# Altium PCB Airplane_Navigation_&_Telemetery_Board.PcbDoc
Units mil, origin at the board's own origin, x right, y up, seen from the top; angles counter-clockwise.
Board outline 6000 x 4000 mil, 2 copper layers (Top Layer, Bottom Layer); 34 components, 22 nets, 201 pads, 9 vias.
Unrouted connection lines stored in the file: 37.
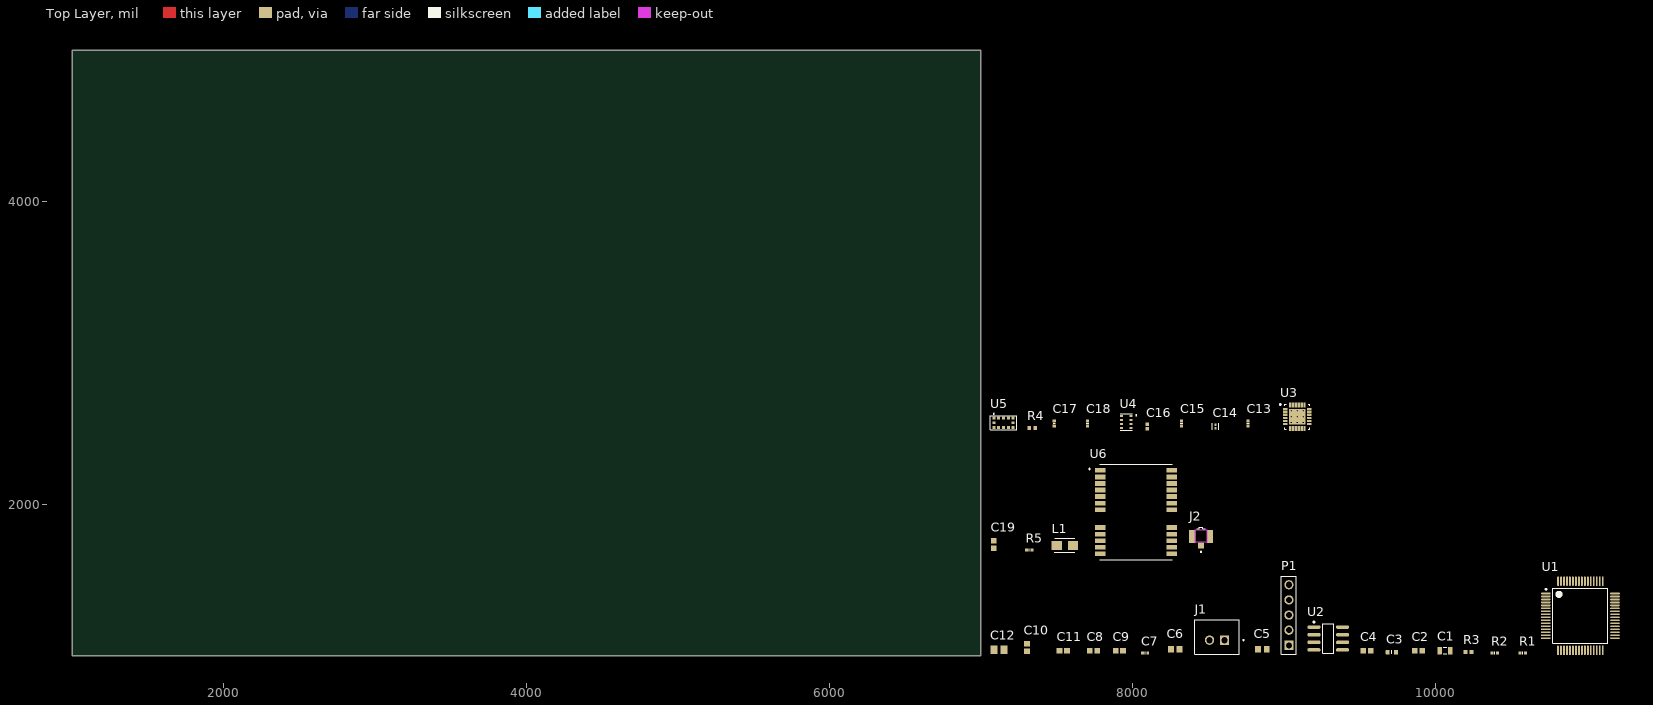
[diagram p0: Top Layer view]
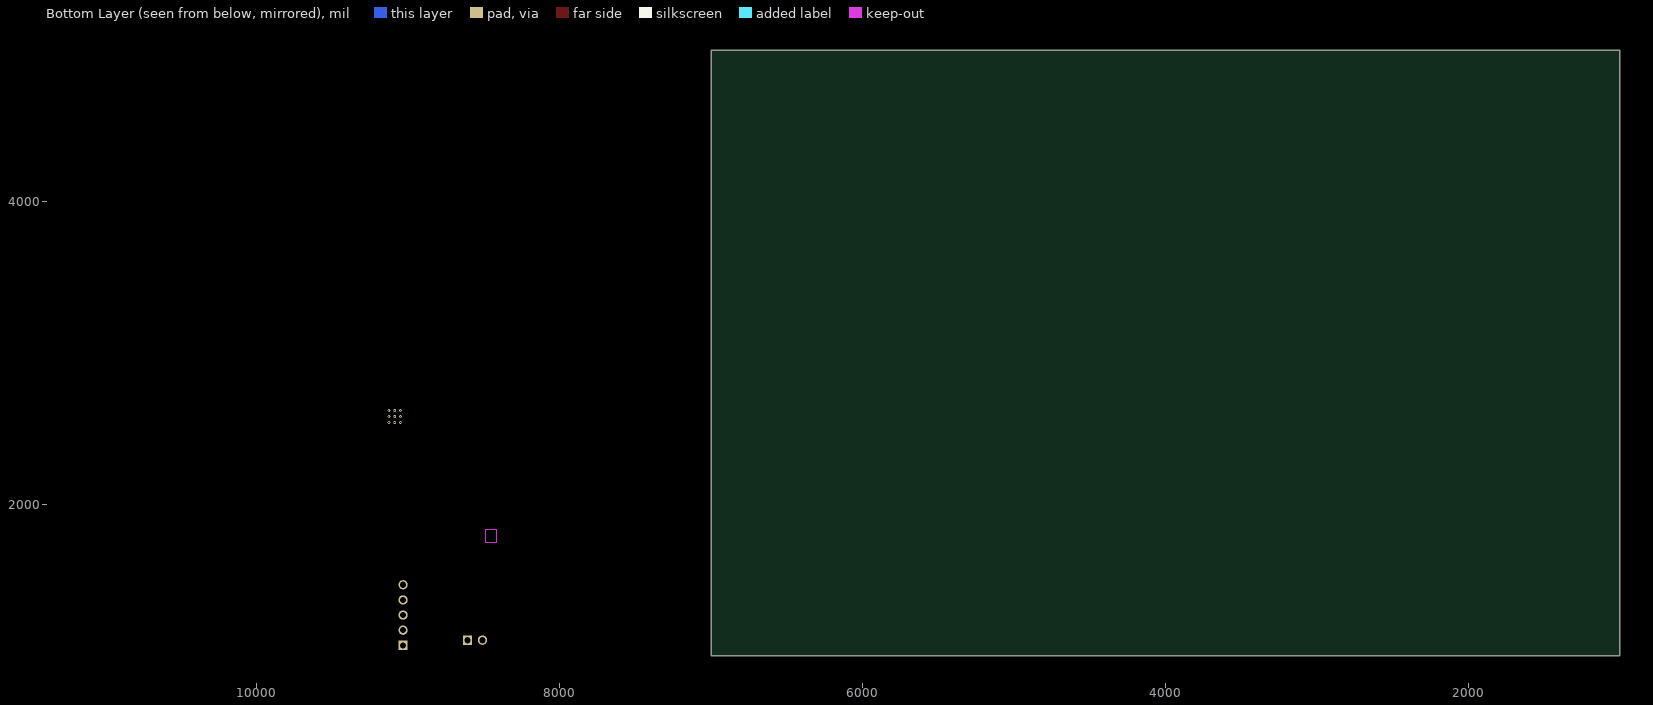
[diagram p1: Bottom Layer view, seen from below]

## Layer stack, top to bottom
Top Solder: solder mask 0.4, Solder Resist, Dk 3.5
Top Layer: signal copper 1.4
Dielectric 1: dielectric 12.6, FR-4, Dk 4.8
Bottom Layer: signal copper 1.4
Bottom Solder: solder mask 0.4, Solder Resist, Dk 3.5

## Board outline
1000,1000 7000,1000 7000,5000 1000,5000

## Design rules (kind name [scope] priority, off if disabled: settings)
Clearance [All] p1: gap=10 ignorepadtopadclearanceinfootprint=FALSE
PolygonConnect [All] p1: connectstyle=Relief reliefconductorwidth=10 reliefentries=4 polygonreliefangle="90 Angle" airgapwidth=10
RoutingVias [All] p1: holewidth=28 width=50 viastyle="Through Hole" minholewidth=28 minwidth=50 maxholewidth=28 maxwidth=50
SolderMaskExpansion [All] p1: expansion=0 istentingtop=FALSE
Width [All] p1: maxlimit=10 minlimit=10 preferedwidth=10
30 further rules are at their usual default settings.

## Classes and differential pairs
component class U_I2C_BUS: C13 C14 C15 C16 C17 C18 R4 U3 U4 U5
component class U_GPS: C19 J2 L1 R5 U6
component class Airplane_Navigation_&_Telemetry_Schematic: C1 C2 C3 C4 C5 C6 C7 C8 C9 C10 C11 C12 J1 P1 R1 R2 R3 U1 U2

## Components (designator, comment, footprint, x,y, rotation, side; value= is the part's Value field where it differs from the comment)
C1 "Capacitor 10µF +/-20% 25V 0805" CAPC0805(2012)145_L 10065,1035 r0 top value=10µF
C2 "Capacitor 100 nF +/-10% 50 V 0603" CAPC1608X90X40NL10T20 9890,1035 r0 top value=100nF
C3 "Capacitor 4.7µF +/-20% 10V 0603" CAPC0603(1608)100_L 9715,1025 r0 top value=4.7µF
C4 "Capacitor 100 nF +/-10% 50 V 0603" CAPC1608X90X40NL10T20 9550,1035 r0 top value=100nF
C5 "Capacitor 1uF +/- 10% 16V 0603" CAPC1608X90X35ML15T15 8860,1045 r0 top value=1µF
C6 "Capacitor 1uF +/- 10% 16V 0603" CAPC1608X90X35ML15T15 8285,1045 r0 top value=1µF
C7 "Capacitor 10nF +/-20% 50V 0402" CAPC0402(1005)60_L 8085,1020 r0 top value=10nF
C8 "Capacitor 100 nF +/-10% 50 V 0603" CAPC1608X90X40NL10T20 7745,1035 r0 top value=100nF
C9 "Capacitor 100 nF +/-10% 50 V 0603" CAPC1608X90X40NL10T20 7915,1035 r0 top value=100nF
C10 "Capacitor 100 nF +/-10% 50 V 0603" CAPC1608X90X40NL10T20 7305,1055 r90 top value=100nF
C11 "Capacitor 100 nF +/-10% 50 V 0603" CAPC1608X90X40NL10T20 7545,1035 r0 top value=100nF
C12 "Capacitor 10 uF +/- 10% 16 V 0805" CAPC2013X135X45NL10T25 7120,1040 r0 top value=10µF
C13 "Capacitor 100nF +/-20% 10V 0402" CAPC0402(1005)60_L 8765,2535 r90 top value=100nF
C14 "GRM033R70J222JA01J" FP-GRM033-0_03-IPC_B 8550,2515 r90 top
C15 "Capacitor 100nF +/-20% 10V 0402" CAPC0402(1005)60_L 8325,2535 r90 top value=100nF
C16 "Capacitor 0.1 uF +/- 5% 16 V 0402" CAPC1005X56X25LL10T15 8100,2515 r90 top value=100nF
C17 "Capacitor 100nF +/-20% 10V 0402" CAPC0402(1005)60_L 7485,2535 r90 top value=100nF
C18 "Capacitor 100nF +/-20% 10V 0402" CAPC0402(1005)60_L 7705,2535 r90 top value=100nF
C19 "Capacitor 100 nF +/-10% 50 V 0603" CAPC1608X90X40NL10T20 7085,1735 r90 top value=100nF
J1 "B2B-XH-A_(LF)(SN)" JST_B2B-XH-A_(LF)(SN) 8560,1125 r0 top
J2 "20279-001E-03" IPEX_20279-001E-03 8455,1790 r0 top
L1 "LQW31HN27NJ03L" FP-LQW31HN_03-MFG 7555,1730 r0 top
P1 "TSW-105-05-L-S" SMTC-TSW-105-05-X-S 9035,1070 r90 top
R1 "Resistor 4K7  +/-1 % 0402 63 mW" RESC0402(1005)_L 10580,1020 r0 top value=4.7k
R2 "Resistor 4K7  +/-1 % 0402 63 mW" RESC0402(1005)_L 10395,1020 r0 top value=4.7k
R3 "Resistor 10k +/-1% 0402 100 mW" RESC1005X40X25ML05T05 10220,1025 r0 top value=10k
R4 "Resistor 10k +/-1% 0402 100 mW" RESC1005X40X25ML05T05 7340,2505 r0 top value=10k
R5 "Resistor 10R  +/-1 % 0402 63 mW" RESC0402(1005)_L 7320,1700 r0 top value=10
U1 "STM32F411RET6" STM-LQFP64_L 10960,1265 r0 top
U2 "LT1763IS8-3.3#PBF" LT-S8-8_N 9295,1115 r0 top
U3 "MPU6050" INSE-QFN-24_V 9090,2580 r0 top
U4 "BMP280" XDCR_BMP280 7960,2545 r0 top
U5 "VL53L0X" SENSOR_VL53L0X 7150,2540 r0 top
U6 "NEO-M9N-00B" XCVR_NEO-M9N-00B 8025,1950 r0 top

## Footprints (in the part's own frame and the unit in brackets; to place one, negate y for a bottom-side part, rotate by r counter-clockwise, add the part's x,y. Pads: shape width x height; smd on the part's side, far side on the other; paste and mask are expansions set on the pad)
CAPC0402(1005)60_L [mm] "Chip Capacitor, Body 1.0x0.5mm, Height 0.6mm, IPC High Density"
  rrect25% 0.5x0.55 smd: 1(-0.45,0) 2(0.45,0)
  silkscreen extent 0,-0.2 0,0.2, body extent -0.5,-0.25 0.5,0.25, height 0.6
CAPC0603(1608)100_L [mm] "Chip Capacitor, Body 1.6x0.8mm, Height 1.0mm, IPC High Density"
  rrect25% 0.66x0.76 smd: 1(-0.7,0) 2(0.7,0)
  silkscreen extent 0,-0.3 0,0.3, body extent -0.8,-0.4 0.8,0.4, height 0.95
CAPC0805(2012)145_L [mm] "Chip Capacitor, Body 2.0x1.2mm, Height 1.45mm, IPC High Density"
  rrect25% 0.76x1.3 smd: 1(-0.9,0) 2(0.89,0)
  silkscreen extent -0.3,-0.55 0.3,0.55, body extent -1,-0.6 1,0.6, height 1.45
CAPC1005X56X25LL10T15 [mm] "Chip Capacitor, 2-Leads, Body 1.10x0.60mm, IPC High Density"
  rect 0.58x0.54 smd: 1(-0.39,0) 2(0.39,0)
  body extent -0.55,-0.3 0.55,0.3, height 0.56
CAPC1608X90X35ML15T15 [mm] "Chip Capacitor, 2-Leads, Body 1.75x0.95mm, IPC Low Density"
  rect 1x1.1 smd: 1(-0.725,0) 2(0.725,0)
  body extent -0.87,-0.48 0.87,0.48, height 0.9
CAPC1608X90X40NL10T20 [mm] "Chip Capacitor, 2-Leads, Body 1.70x0.90mm, IPC Medium Density"
  rect 0.95x0.95 smd: 1(-0.625,0) 2(0.625,0)
  body extent -0.85,-0.45 0.85,0.45, height 0.9
CAPC2013X135X45NL10T25 [mm] "Chip Capacitor, 2-Leads, Body 2.10x1.35mm, IPC Medium Density"
  rect 1.2x1.4 smd: 1(-0.85,0) 2(0.85,0)
  body extent -1.05,-0.67 1.05,0.67, height 1.35
FP-GRM033-0_03-IPC_B [mil]
  rect 17.88x14.28 smd paste+0 mask+0: 1(-11.98,0) 2(11.98,0)
  silkscreen extent -21,-23 21,23, body extent -27,-13 27,13, height 10
FP-LQW31HN_03-MFG [mm]
  rect 1.75x1.5 smd paste+0 mask+0: 1(-1.375,0) 2(1.375,0)
  silkscreen extent -1.75,-1.17 1.7,1.17, body extent -2.35,-1 2.35,1, height 0.25
INSE-QFN-24_V [mm] "QFN, 24-Leads, Body 4.00x4.00mm, Pitch 0.50mm, Thermal Pad 2.7x2.6mm"
  rect 0.8x0.35 smd: 1(-2,1.25) 2(-2,0.75) 3(-2,0.25) 4(-2,-0.25) 5(-2,-0.75) 6(-2,-1.25) 13(2,-1.25) 14(2,-0.75) 15(2,-0.25) 16(2,0.25) 17(2,0.75) 18(2,1.25)
  rect 0.35x0.85 smd: 7(-1.25,-1.975) 8(-0.75,-1.975) 9(-0.25,-1.975) 10(0.25,-1.975) 11(0.75,-1.975) 12(1.25,-1.975) 19(1.25,1.975) 20(0.75,1.975) 21(0.25,1.975) 22(-0.25,1.975) 23(-0.75,1.975) 24(-1.25,1.975)
  rect 2.7x2.6 smd: 25(0,0)
  silkscreen extent -2.97,-2.1 2.1,2.17, body extent -2,-2 2,2, height 0.95
IPEX_20279-001E-03 [mm]
  rect 1x1.05 smd: 1(0,-1.525)
  rect 1.05x2.2 smd: 2(1.475,0) 3(-1.475,0)
  Keep-Out Layer region: 0.95,-1 -0.95,-1 -0.95,1.1 0.95,1.1
  silkscreen extent -0.7,-2.71 0.7,1.55, body extent -1.5,-1.55 1.5,1.55, height 1.25
JST_B2B-XH-A_(LF)(SN) [mm]
  rect 1.575x1.575 / inner round 1.575 / far side rect 1.575x1.575 hole 1.05: 1(1.25,-0.525)
  round 1.575 hole 1.05: 2(-1.25,-0.525)
  silkscreen extent -3.7,-2.88 4.54,2.88, body extent -3.7,-2.88 3.7,2.88, height 7
LT-S8-8_N [mm] "SOIC, 8-Leads, Body 4.9x3.9mm, Pitch 1.27mm, IPC Medium Density"
  oval 2.2x0.6 smd: 1(-2.4,1.905) 2(-2.4,0.635) 3(-2.4,-0.635) 4(-2.4,-1.905) 5(2.4,-1.905) 6(2.4,-0.635) 7(2.4,0.635) 8(2.4,1.905)
  silkscreen extent -2.52,-2.5 0.9,2.88, body extent -2,-2.5 2,2.5, height 1.76
RESC0402(1005)_L [mm] "Chip Resistor, Body 1.0x0.5mm, IPC High Density"
  rrect25% 0.5x0.55 smd: 1(-0.45,0) 2(0.45,0)
  silkscreen extent 0,-0.2 0,0.2, body extent -0.5,-0.25 0.5,0.25, height 0.3
RESC1005X40X25ML05T05 [mm] "Chip Resistor, 2-Leads, Body 1.05x0.55mm, IPC Low Density"
  rect 0.65x0.65 smd: 1(-0.5,0) 2(0.5,0)
  body extent -0.53,-0.28 0.53,0.28, height 0.4
SENSOR_VL53L0X [mm]
  rect 0.5x0.5 smd: 1(-1.6,0.8) 2(-0.8,0.8) 3(0,0.8) 4(0.8,0.8) 5(1.6,0.8) 6(1.6,0) 7(1.6,-0.8) 8(0.8,-0.8) 9(0,-0.8) 10(-0.8,-0.8) 11(-1.6,-0.8) 12(-1.6,0)
  silkscreen extent -2.2,-1.2 2.2,1.57
SMTC-TSW-105-05-X-S [mm] ".025 SQ Post Terminal Strip Assembly, 1x5 Pins, Vertical, 2.54mm Pitch, Male"
  rect 1.55x1.55 hole 1.02: 1(0,0)
  round 1.55 hole 1.02: 2(2.54,0) 3(5.08,0) 4(7.62,0) 5(10.16,0)
  silkscreen extent -1.46,-1.27 11.62,1.27, body extent -1.27,-1.27 11.43,1.27, height 5.21
STM-LQFP64_L [mm] "QFP, 64-Leads, Body 10x10mm, Pitch 0.5mm, IPC High Density"
  oval 1.6x0.3 smd: 1(-5.8,3.75) 2(-5.8,3.25) 3(-5.8,2.75) 4(-5.8,2.25) 5(-5.8,1.75) 6(-5.8,1.25) 7(-5.8,0.75) 8(-5.8,0.25) 9(-5.8,-0.25) 10(-5.8,-0.75) 11(-5.8,-1.25) 12(-5.8,-1.75) 13(-5.8,-2.25) 14(-5.8,-2.75) 15(-5.8,-3.25) 16(-5.8,-3.75) 33(5.8,-3.75) 34(5.8,-3.25) 35(5.8,-2.75) 36(5.8,-2.25) 37(5.8,-1.75) 38(5.8,-1.25) 39(5.8,-0.75) 40(5.8,-0.25) 41(5.8,0.25) 42(5.8,0.75) 43(5.8,1.25) 44(5.8,1.75) 45(5.8,2.25) 46(5.8,2.75) 47(5.8,3.25) 48(5.8,3.75)
  oval 0.3x1.6 smd: 17(-3.75,-5.8) 18(-3.25,-5.8) 19(-2.75,-5.8) 20(-2.25,-5.8) 21(-1.75,-5.8) 22(-1.25,-5.8) 23(-0.75,-5.8) 24(-0.25,-5.8) 25(0.25,-5.8) 26(0.75,-5.8) 27(1.25,-5.8) 28(1.75,-5.8) 29(2.25,-5.8) 30(2.75,-5.8) 31(3.25,-5.8) 32(3.75,-5.8) 49(3.75,5.8) 50(3.25,5.8) 51(2.75,5.8) 52(2.25,5.8) 53(1.75,5.8) 54(1.25,5.8) 55(0.75,5.8) 56(0.25,5.8) 57(-0.25,5.8) 58(-0.75,5.8) 59(-1.25,5.8) 60(-1.75,5.8) 61(-2.25,5.8) 62(-2.75,5.8) 63(-3.25,5.8) 64(-3.75,5.8)
  silkscreen extent -5.92,-4.6 4.6,4.6, body extent -5,-5 5,5, height 1.6
XCVR_NEO-M9N-00B [mm]
  rect 1.8x0.8 smd paste-2: 1(-6,7) 2(-6,5.9) 3(-6,4.8) 4(-6,3.7) 5(-6,2.6) 6(-6,1.5) 7(-6,0.4) 8(-6,-2.6) 9(-6,-3.7) 10(-6,-4.8) 11(-6,-5.9) 12(-6,-7) 13(6,-7) 14(6,-5.9) 15(6,-4.8) 16(6,-3.7) 17(6,-2.6) 18(6,0.4) 19(6,1.5) 20(6,2.6) 21(6,3.7) 22(6,4.8) 23(6,5.9) 24(6,7)
  silkscreen extent -7.9,-8 6.1,8, body extent -6.1,-8 6.1,8, height 2.6
XDCR_BMP280 [mm]
  rect 0.5x0.35 smd: 1(0.8,0.975) 2(0.8,0.325) 3(0.8,-0.325) 4(0.8,-0.975) 5(-0.8,-0.975) 6(-0.8,-0.325) 7(-0.8,0.325) 8(-0.8,0.975)
  silkscreen extent -1,-1.35 1.8,1.35

## Part data
C1: library part CMP-001-00079-4, "Chip Capacitor, 10µF +/-20%, 25V, 0805, Thickness 1.45 mm", Case/Package=0805, Max Operating Temperature=85°C, Min Operating Temperature=-55°C, Tolerance=10%, Voltage Rating=25V, Mounting Technology=SMT, Pins=2
C2 C4 C8 C9 C10 C11 C19: library part CMP-001-00017-6, "Chip Capacitor, 100 nF, +/- 10%, 50 V, 0603 (1608 Metric)", Capacitor Type=Ceramic, Case/Package=0603, Max Operating Temperature=125°C, Min Operating Temperature=-55°C, Tolerance=10%, Voltage Rating=50V, Mounting Technology=SM, Pins=2, RoHS Compliant=True
C3: library part CMP-001-00076-4, "Chip Capacitor, 4.7µF +/-20%, 10V, 0603, Thickness 1 mm", Case/Package=0603, Max Operating Temperature=85°C, Min Operating Temperature=-55°C, Tolerance=10%, Voltage Rating=10V, Mounting Technology=SMT, Pins=2
C5 C6: library part CMP-001-00004-6, "Chip Capacitor, 1 uF, +/- 10%, 16 V, 0603 (1608 Metric)", Capacitor Type=Ceramic, Case/Package=0603, Max Operating Temperature=125°C, Min Operating Temperature=-55°C, Tolerance=10%, Voltage Rating=16V, Mounting Technology=SM, Pins=2, RoHS Compliant=True
C7: library part CMP-001-00069-3, "Chip Capacitor, 10nF +/-20%, 50V, 0402, Thickness 0.6 mm", Case/Package=0402, Max Operating Temperature=85°C, Min Operating Temperature=-55°C, Tolerance=5%, Voltage Rating=50V, Mounting Technology=SMT, Pins=2
C12: library part CMP-001-00015-6, "Chip Capacitor, 10 uF, +/- 10%, 16 V, 0805 (2012 Metric)", Capacitor Type=Ceramic, Case/Package=0805, Max Operating Temperature=85°C, Min Operating Temperature=-55°C, Tolerance=10%, Voltage Rating=16V, Mounting Technology=SM, Pins=2, RoHS Compliant=True
C13 C15 C17 C18: library part CMP-001-00061-3, "Chip Capacitor, 100nF +/-20%, 10V, 0402, Thickness 0.6 mm", Case/Package=0402, Max Operating Temperature=85°C, Min Operating Temperature=-55°C, Tolerance=20%, Voltage Rating=10V, Mounting Technology=SMT, Pins=2
C14: library part CMP-06035-025705-1, "Chip Multilayer Ceramic Capacitors for General Purpose, 0201, 2200pF, X7R, 15%, 5%, 6.3V", Capacitance=2.2nF, Dielectric=X7R, Tolerance=5%, Voltage Rating (DC)=6.3V, Length=600um, Thickness=300um, Width=300um
C16: library part CMP-001-00001-6, "Chip Capacitor, 0.1 uF, +/- 5%, 16 V, 0402 (1005 Metric)", Capacitor Type=Ceramic, Case/Package=0402, Max Operating Temperature=125°C, Min Operating Temperature=-55°C, Tolerance=5%, Voltage Rating=16V, Mounting Technology=SM, Pins=2, RoHS Compliant=True
J1: library part CMP-002-00072-1, "Connector Header Through Hole 2 position 0.098 (2.50mm)", Case/Package=None, Check_prices=https://www.snapeda.com/parts/B2B-XH-A%20(LF)(SN)/JST+Sales+America+Inc./view-part/?ref=eda, Component Type=Standard, Design Item ID=B2B-XH-A_(LF)(SN), MF="JST Sales", MP="B2B-XH-A (LF)(SN)", Pins=2, SnapEDA_Link=https://www.snapeda.com/parts/B2B-XH-A%20(LF)(SN)/JST+Sales+America+Inc./view-part/?ref=snap, Source=B2B-XH-A_(LF)(SN).SchLib
J2: library part CMP-002-00071-1, "1 POS Vertical SMD Small form factor with big performance through 6 GHz connector,MHF, RF, micro-coaxial MHF I Receptacle", Case/Package=None, Check_prices=https://www.snapeda.com/parts/20279-001E-03/I-PEX/view-part/?ref=eda, Component Type=Standard, Design Item ID=20279-001E-03, MF=I-PEX, MP=20279-001E-03, Pins=3, SnapEDA_Link=https://www.snapeda.com/parts/20279-001E-03/I-PEX/view-part/?ref=snap, Source=20279-001E-03.SchLib
L1: library part CMP-06042-006372-1, "Wire Wound RF Inductor 27nH ±5% 0.0714Ω 560mA 1206", Case Code (Imperial)=1206, Case Code (Metric)=3216, Current Rating=560mA, DC Resistance (DCR)=51mR, Inductance=27nH, Max Operating Temperature=85°C, Min Operating Temperature=-40°C, Package Quantity=2000, Resistor Type=Wirewound, Self Resonant Frequency=1GHz, Test Frequency=100MHz, Tolerance=5%, Case/Package=1206, Core Material=Ferrite, DC Current=560mA, Depth=1.8mm, Height=1.8mm, Height - Seated (Max)=0.079inch, Length=3.2mm, Max DC Current=560mA, Military Standard=Not, Mount="Surface Mount", Packaging="Tape and Reel", Q Factor=60, Radiation Hardening=No, Shielding=Unshielded, Termination=SMD/SMT, Weight=0.000705oz, Width=0.063inch
P1: library part CMP-1024-00366-1, "0.025\" SQ Post Header, Through-hole, Vertical, -55 to 125 degC, 2.54 mm Pitch, 5-Pin, Male, RoHS", Manufacturer=Samtec, Temperature Range="-55 to 125 degC", ComponentLink1Description="Manufacturer URL", ComponentLink1URL=http://www.samtec.com, ComponentLink2Description=Datasheet, ComponentLink2URL=http://www.samtec.com/documents/webfiles/pdf/TSW_TH.PDF, ComponentLink3Description="Package Specification", ComponentLink3URL=http://www.samtec.com/documents/webfiles/cpdf/TSW-XXX-XX-XXX-X-XX-XXX-MKT.pdf, DatasheetVersion=F-214, Mounting Technology=Through-hole, Orientation=Vertical, PackageDescription=".025[0.64] SQ. Post Terminal Strip Assembly", PackageReference=TSW-105-05-X-S, PackageVersion="DM, 8/1988", PartNumber=TSW-105-05-L-S, Pitch="2.54 mm", RoHS=True
R1 R2: library part CMP-009-00158-3, "Chip Resistor, 4,7 kOhms, +/-1 %, 63 mW, -55 to 155 degC, 0402", Case/Package=0402, Max Operating Temperature=155°C, Min Operating Temperature=-55°C, Power=63mW, Tolerance=1%, Pins=2
R3 R4: library part CMP-009-00015-5, "Chip Resistor, 10 KOhm, +/- 1%, 0.1 W, -55 to 155 degC, 0402 (1005 Metric)", Case/Package=0402, Max Operating Temperature=155°C, Min Operating Temperature=-55°C, Power=100mW, Tolerance=1%, Voltage Rating=50V, Mounting Technology=SM, Pins=2, RoHS Compliant=True
R5: library part CMP-009-00152-3, "Chip Resistor, 10 Ohms, +/-1 %, 63 mW, -55 to 155 degC, 0402", Case/Package=0402, Max Operating Temperature=155°C, Min Operating Temperature=-55°C, Power=63mW, Tolerance=1%, Pins=2
U1: library part CMP-0243-00169-1, "ARM Cortex-M4 32-bit MCU+FPU, 512 KB Flash, 128 KB RAM, 50 I/Os, 64-Pin LQFP, -40 to 85 degC, Tray", I/Os (High Current)=50, Operating Frequency(F) (Processor speed) (MHz)=100, Package Description=LQFP64, Package Reference="64-Pin Low-profile Quad Flat Package, Body 10 x 10 mm, Pitch 0.5 mm", Supply Voltage(Vcc) min (V)=1.7, ComponentLink1Description="Manufacturer URL", ComponentLink1URL=http://www.st.com/, ComponentLink2Description=Datasheet, ComponentLink2URL=http://www.st.com/st-web-ui/static/active/en/resource/technical/document/datasheet/DM00115249.pdf, Core="ARM Cortex-M4", DatasheetVersion="Rev. 6", FLASH Size (Prog) (kB)=512, Internal RAM Size (kB)=128, Mounting Technology="Surface Mount", Packing=Tray
U2: library part CMP-0476-01566-1, "500 mA, Low Noise, LDO Micropower Regulator, 1.8 to 20 V Vin, 3.3 V Vout, 8-pin SOIC (S8-8), -40 to 125 degC, Pb-Free", Dropout Voltage(V)=0.3, Manufacturer="Linear Technology", Output Voltage="3.3 V", Shutdown Current(uA)=1, ComponentLink1Description="Manufacturer URL", ComponentLink1URL=http://www.linear.com/, ComponentLink2Description=Datasheet, ComponentLink2URL=http://cds.linear.com/docs/en/datasheet/1763fg.pdf, ComponentLink3Description="Package Specification", ComponentLink3URL=http://cds.linear.com/docs/en/packaging/05081610_G_SO8.pdf, DatasheetVersion="Rev. G", Discrete Pass Element=no, Iout(mA)=500, Isupply(mA)=0.03, Mounting Technology="Surface Mount", Noise(uV)=20, Number of Outputs=1, PackageDescription="8-Pin Plastic Small Outline (Narrow .150 Inch), Body 4.9 x 3.9 mm, Pitch 1.27 mm", PackageReference=S8-8, PackageVersion="Rev. G, 03/2012", PartNumber=LT1763IS8-3.3#PBF, PSRR(dB)=65, RoHS=TRUE, Vin Max(V)=20, Vin Min(V)=1.8
U3: library part CMP-010-00014-3, "3-Axis Gyroscope, 3-Axis Accelerometer, 2.375 to 3.46 V, -40 to 105 degC, 24-Pin QFN, RoHS, Tape and Reel", Case/Package=QFN, Manufacturer=InvenSense, Max Operating Temperature=85°C, Max Supply Voltage=3.6V, Min Operating Temperature=-40°C, Min Supply Voltage=2.5V, Package Description="24-Pin Quad Flat No-lead Package, Body 4 x 4 mm, Pitch 0.5 mm", Package Quantity=5000, Package Reference=QFN-24, Datasheet URL=https://datasheet.ciiva.com/1513/1788002-1513632.pdf, Datasheet Version="Rev. 3.4, 08/2013", Interface=I2C, Mounting Technology=SM, Packaging=CutTape, Pins=24, RoHS Compliant=True, Sensor Type=Motion
U4: library part CMP-00029-00001-1, "BMP280 Absolute Barometric Pressure Sensor for Battery Powered Devices 2 x 2.5mm", Case/Package=None, Availability=Unavailable, Component Type=Standard, Design Item ID=BMP280, MP=BMP280, Pins=8, Price=None, Source=BMP280.SchLib
U5: library part CMP-013-000000-1, "VL53L0X - Light, 3D Time-of-Flight _ToF_ Sensor Evaluation Board", Package=None, Availability=Unavailable, Component Type=Standard, Design Item ID=VL53L0X, MF=STMicroelectronics, MP=VL53L0X, Pin Count=11, Price=None, SnapEDA_Link=https://www.snapeda.com/parts/VL53L0X/STMicroelectronics/view-part/473967/?ref=snap, Source=SnapEDAsch.SchLib
U6: library part CMP-015-000000-1, "series RF Receiver BeiDou, Galileo, GLONASS, GNSS, GPS - -167dBm - - Module", Package="SMD-24 u-blox", Check_prices=https://www.snapeda.com/parts/NEO-M9N-00B/u-blox/view-part/?ref=eda, Component Type=Standard, Design Item ID=NEO-M9N-00B, MF=u-blox, MP=NEO-M9N-00B, Pin Count=24, SnapEDA_Link=https://www.snapeda.com/parts/NEO-M9N-00B/u-blox/view-part/?ref=snap, Source=NEO-M9N-00B.SchLib

## Via types
v1: diameter 19.68, hole 7.87, Top Layer to Bottom Layer, 9 vias

## Nets (pads, with @x,y where several pads share a name; then routed paths per layer and width w, separated by ;. In a path a pad name is that pad's centre, name@x,y a point inside that pad or via, vN(x,y) a via of type N, cw(c..) or ccw(c..) an arc to the next point about the centre after c; other vN are vias at no path point)
GND: C19.1 J2.2 J2.3 U6.10 U6.12 U6.13 U6.24
NetC3_1: C3.1 U1.30
NetC4_1: C4.1 C5.2
NetC7_2: C7.2 U2.4
NetC8_1: C8.1 U1.19
NetC9_1: C9.1 U1.48
NetC10_1: C10.1 U1.32
NetC11_1: C11.1 U1.64
NetC14_2: C14.2 U3.20
NetC16_1: C16.1 U3.10
NetC19_2: C19.2 L1.1 R5.2
NetJ2_1: J2.1 L1.2 U6.11
NetR3_1: R3.1 U1.60
NetR4_1: R4.1 U5.5
NetR5_1: R5.1 U6.9
NRST: C2.1 U1.7
SCL: R1.1 U1.58 U3.23 U4.4 U5.10 U6.19
SDA: R2.1 U1.59 U3.24 U4.3 U5.9 U6.18
SWDCL: U1.49
SWDIO: U1.46
VCC: U6.2 U6.23
VIN: C6.2 J1.1 U2.5 U2.8
pads on no net: C1.1 C1.2 C2.2 C3.2 C4.2 C5.1 C6.1 C7.1 C8.2 C9.2 C10.2 C11.2 C12.1 C12.2 C13.1 C13.2 C14.1 C15.1 C15.2 C16.2 C17.1 C17.2 C18.1 C18.2 J1.2 P1.1 P1.2 P1.3 P1.4 P1.5 R1.2 R2.2 R3.2 R4.2 U1.1 U1.2 U1.3 U1.4 U1.5 U1.6 U1.8 U1.9 U1.10 U1.11 U1.12 U1.13 U1.14 U1.15 U1.16 U1.17 U1.18 U1.20 U1.21 U1.22 U1.23 U1.24 U1.25 U1.26 U1.27 U1.28 U1.29 U1.31 U1.33 U1.34 U1.35 U1.36 U1.37 U1.38 U1.39 U1.40 U1.41 U1.42 U1.43 U1.44 U1.45 U1.47 U1.50 U1.51 U1.52 U1.53 U1.54 U1.55 U1.56 U1.57 U1.61 U1.62 U1.63 U2.1 U2.2 U2.3 U2.6 U2.7 U3.1 U3.2 U3.3 U3.4 U3.5 U3.6 U3.7 U3.8 U3.9 U3.11 U3.12 U3.13 U3.14 U3.15 U3.16 U3.17 U3.18 U3.19 U3.21 U3.22 U3.25 U4.1 U4.2 U4.5 U4.6 U4.7 U4.8 U5.1 U5.2 U5.3 U5.4 U5.6 U5.7 U5.8 U5.11 U5.12 U6.1 U6.3 U6.4 U6.5 U6.6 U6.7 U6.8 U6.14 U6.15 U6.16 U6.17 U6.20 U6.21 U6.22
copper on no net:
  other v1: 9050.63,2540.63 9090,2540.63 9129.37,2540.63 9050.63,2580 9090,2580 9129.37,2580 9050.63,2619.37 9090,2619.37 9129.37,2619.37